# EAGLE board stm32f103_ethernet_shield_2 (EAGLE 9.6.2)
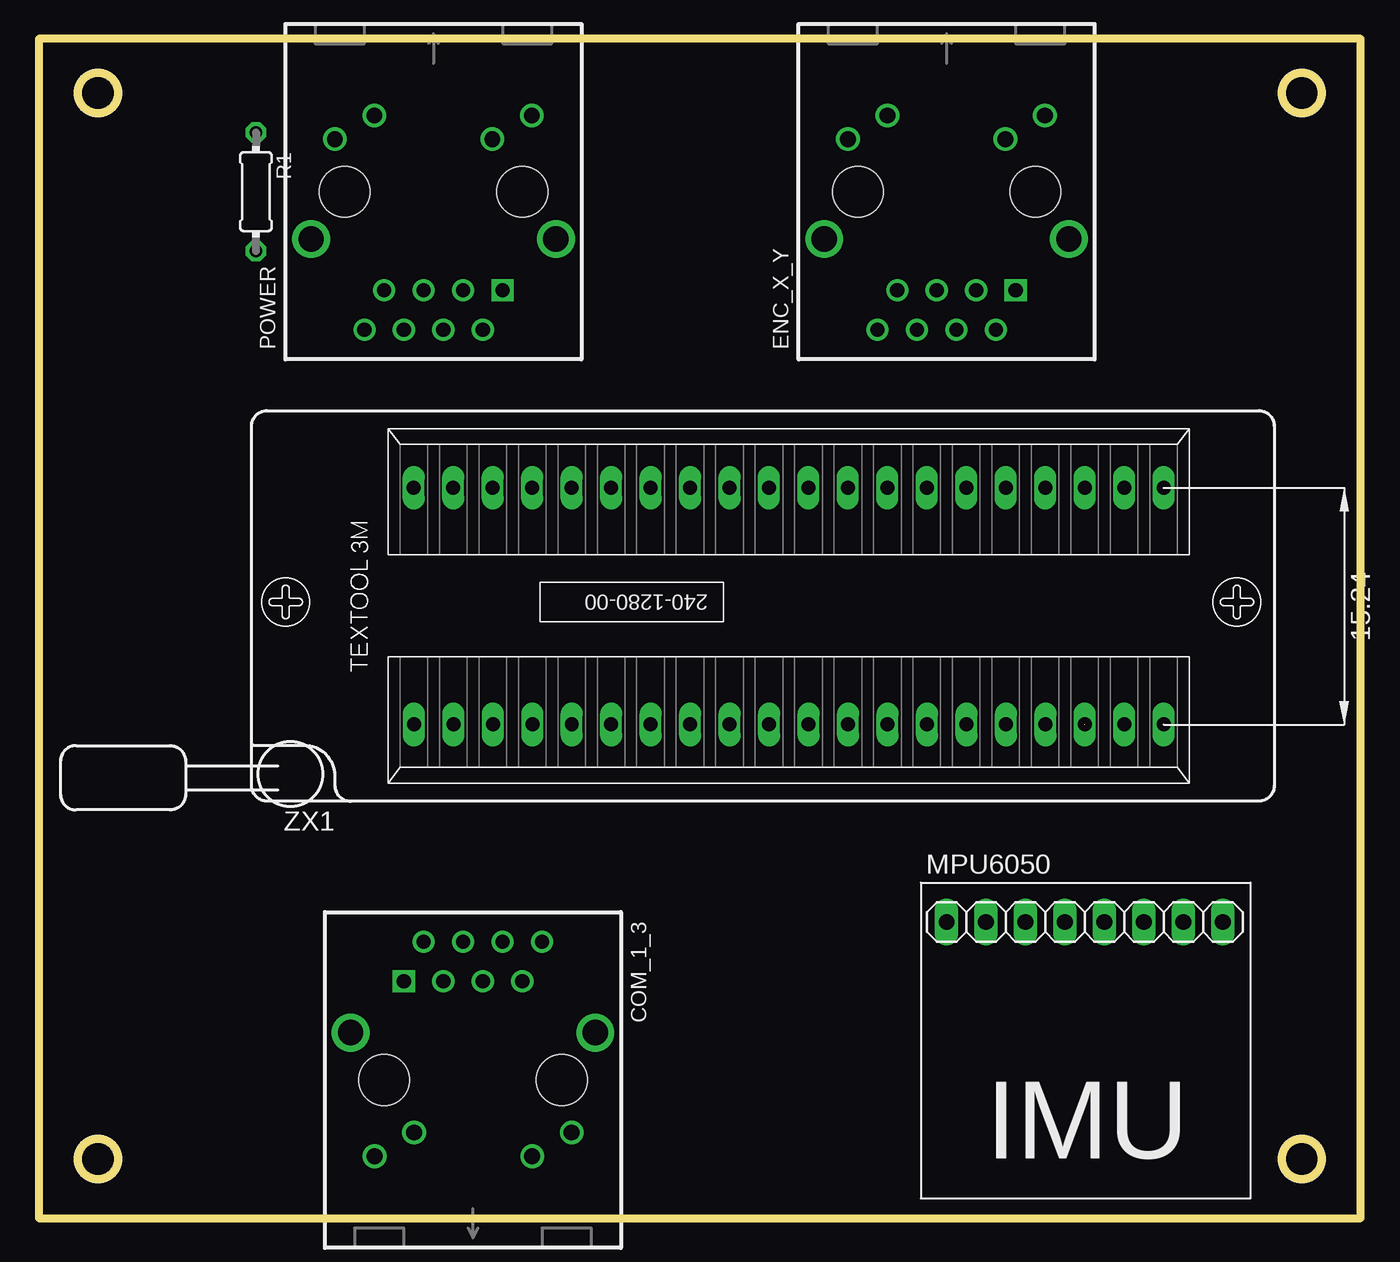
[diagram p0: board, top side]
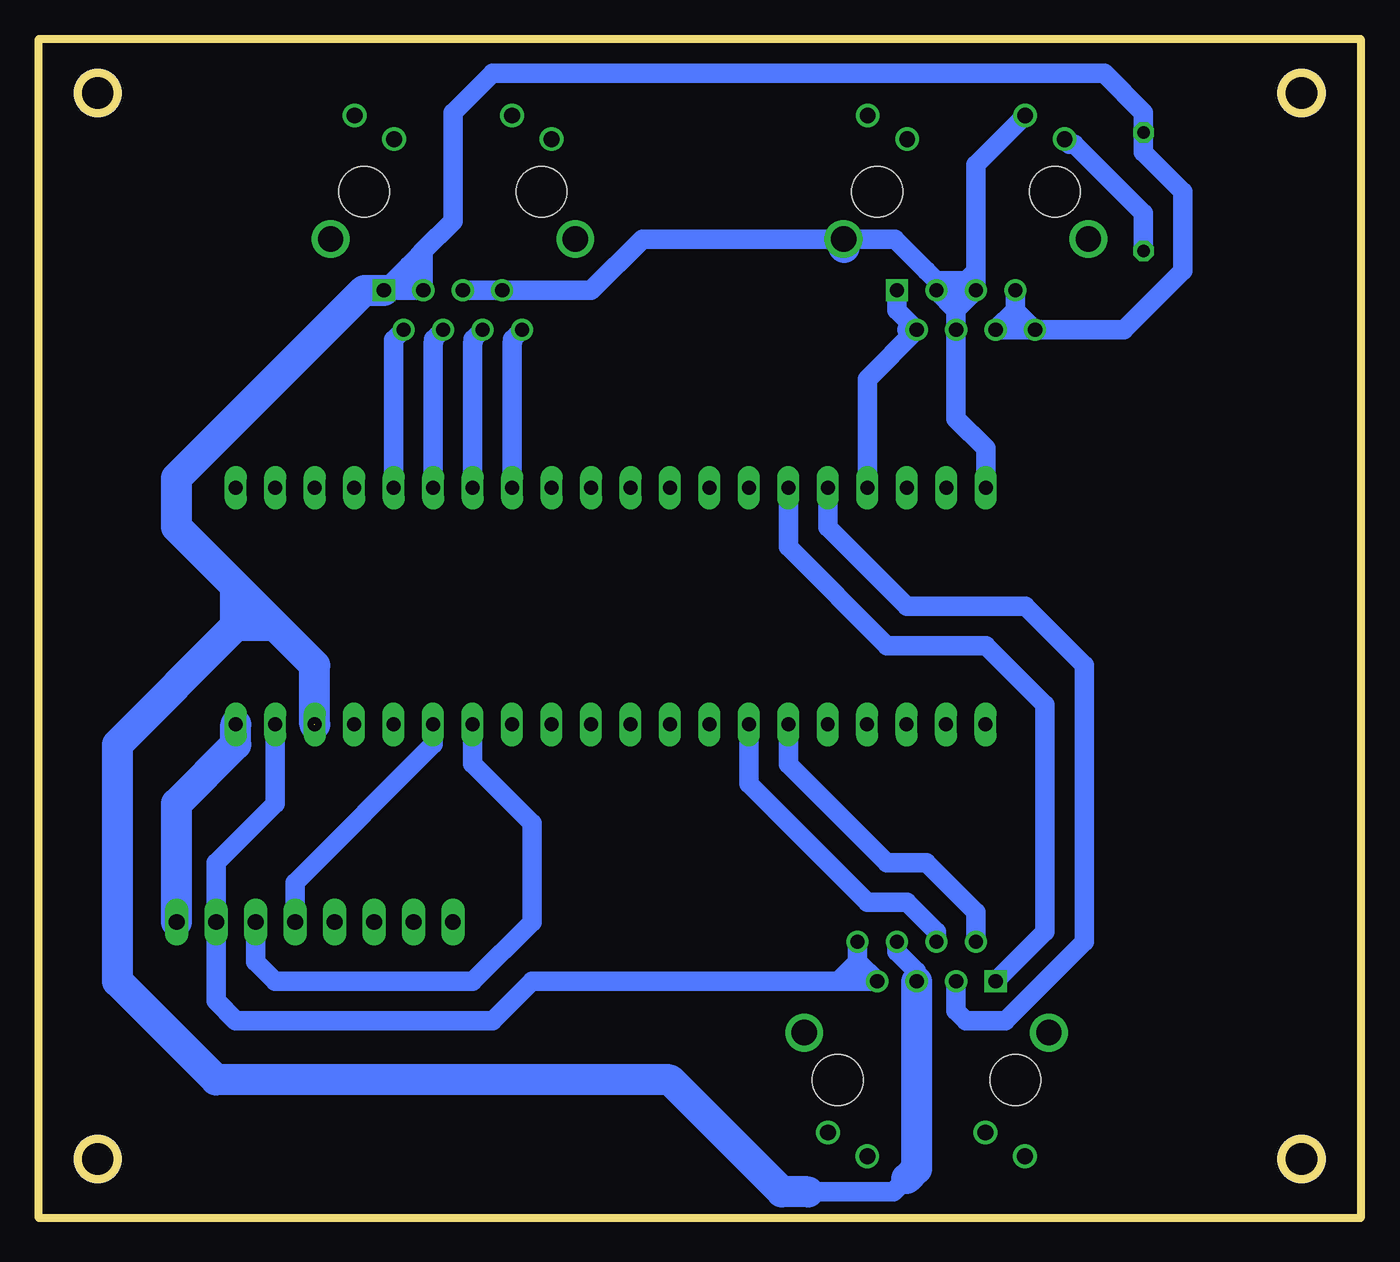
[diagram p1: board, bottom side, seen from below]

Size 85.07 x 75.87 mm. Coordinates in mm from the lower left corner, seen from the top.
Outline: 0,0 85.07,0 85.07,75.87 0,75.87 0,0
Outline: circle at 3.81,72.39 radius 1.27
Outline: circle at 81.28,72.39 radius 1.27
Outline: circle at 81.28,3.81 radius 1.27
Outline: circle at 3.81,3.81 radius 1.27
Copper layers (1*16): Top 0.035mm / dielectric 1.5mm / Bottom 0.035mm
Design rules "design_rules": minimum track width 0.8mm, minimum drill 1mm, track to track 0.6mm, track to pad 0.6mm, pad to pad 0.6mm, via to via 0.6mm, smd to smd 0.6mm, copper to edge 0.8mm, drill to drill 0.8mm, minimum pad ring 10mil, minimum via ring 8mil, stop-mask expansion 4mil, vias tented up to drill 0mil, thermal gap 10mil
Holes 3 mm at 3.81,72.39 3.81,3.81 81.28,3.81 81.28,72.39

## Footprints (pad centres in the part's own frame; a part is rotated, then mirrored left to right if it is on the bottom)
J0-A/B/F = drill 0.914 square: 1 4.445,-6.35 | drill 0.914: 2 3.175,-8.89; 3 1.905,-6.35; 4 0.635,-8.89; 5 -0.635,-6.35; 6 -1.905,-8.89; 7 -3.175,-6.35; 8 -4.445,-8.89 | drill 1.016: 9 6.325,4.902; 10 3.785,3.378; 11 -3.81,4.902; 12 -6.35,3.378 | drill 1.626: S1 -7.874,-3.048; S2 7.874,-3.048 | hole 3.251: -5.715,0; 5.715,0
IMU_GY521 = drill 1.016 long: ADO -6.35,0; GND 6.35,0; INT -8.89,0; SCL 3.81,0; SDA 1.27,0; VCC 8.89,0; XCL -3.81,0; XDA -1.27,0
0204/7 = drill 0.813 octagon: 1 -3.81,0; 2 3.81,0
240-1280-00-0602J = drill 0.9 long: 1 -24.12,-8.88; 2 -21.58,-8.88; 3 -19.04,-8.88; 4 -16.5,-8.88; 5 -13.96,-8.88; 6 -11.42,-8.88; 7 -8.88,-8.88; 8 -6.34,-8.88; 9 -3.8,-8.88; 10 -1.26,-8.88; 11 1.28,-8.88; 12 3.82,-8.88; 13 6.36,-8.88; 14 8.9,-8.88; 15 11.44,-8.88; 16 13.98,-8.88; 17 16.52,-8.88; 18 19.06,-8.88; 19 21.6,-8.88; 20 24.14,-8.88; 21 24.13,6.35; 22 21.59,6.35; 23 19.05,6.35; 24 16.51,6.35; 25 13.97,6.35; 26 11.43,6.35; 27 8.89,6.35; 28 6.35,6.35; 29 3.81,6.35; 30 1.27,6.35; 31 -1.27,6.35; 32 -3.81,6.35; 33 -6.35,6.35; 34 -8.89,6.35; 35 -11.43,6.35; 36 -13.97,6.35; 37 -16.51,6.35; 38 -19.05,6.35; 39 -21.59,6.35; 40 -24.13,6.35

## Placement (x,y rotation side)
COM_1_3  RJ45  [J0-A/B/F]  27.94,8.89 180 top
ENC_X_Y  RJ45  [J0-A/B/F]  58.42,66.04 0 top
MPU6050  IMU_ROBOCON_GY521  [IMU_GY521]  67.31,19.05 0 top
POWER  RJ45  [J0-A/B/F]  25.4,66.04 0 top
R1  150R  [0204/7]  13.97,66.04 270 top
ZX1  ZIF_401280  [240-1280-00-0602J]  48.26,40.64 0 top

## Library data of the parts
COM_1_3 MPU6050 POWER R1 ZX1 = MIA_LIBRARY-2-2-2
ENC_X_Y = MIA_LIBRARY-2-2-2; SPICEPREFIX: X

## Nets
3V3@1: MPU6050.VCC ZX1.20
3V3@2: ZX1.38
5V: COM_1_3.5 COM_1_3.6 ENC_X_Y.1 ENC_X_Y.3 POWER.6 POWER.7 POWER.8 R1.1 ZX1.18
GND@1: COM_1_3.7 COM_1_3.8 MPU6050.GND ZX1.19
GND@2: ZX1.39
GND@3: ENC_X_Y.5 ENC_X_Y.7 POWER.3 POWER.4 POWER.5 POWER.11 POWER.S2 ZX1.40
PA_0: ENC_X_Y.2 ZX1.25
PA_1: ENC_X_Y.4 ZX1.26
PA_2: ENC_X_Y.6 ZX1.27
PA_3: ENC_X_Y.8 ZX1.28
PA_4: ZX1.29
PA_5: ZX1.30
PA_6: ZX1.31
PA_7: ZX1.32
PA_8: ZX1.5
PA_9: COM_1_3.2 ZX1.6
PA_10: COM_1_3.4 ZX1.7
PA_11: ZX1.8
PA_12: ZX1.9
PA_15: ZX1.10
PB_0: ZX1.33
PB_1: ZX1.34
PB_3: ZX1.11
PB_4: ZX1.12
PB_5: ZX1.13
PB_6: MPU6050.SCL ZX1.14
PB_7: MPU6050.SDA ZX1.15
PB_8: ZX1.16
PB_9: ZX1.17
PB_10: COM_1_3.1 ZX1.35
PB_11: COM_1_3.3 ZX1.36
PB_12: ZX1.1
PB_13: ZX1.2
PB_14: ZX1.3
PB_15: ZX1.4
PC_13: ZX1.22
PC_14: ZX1.23
PC_15: ZX1.24
RA1: POWER.12 R1.2
RESET: POWER.1 POWER.2 ZX1.37
VB: ZX1.21

## Tracks (layer width: path | path; a pad name or v marks a point on that pad's centre or on a via)
3V3@1
  Bottom 2: ZX1.20 72.39,30.48 76.2,26.67 MPU6050.VCC
5V  (1 unrouted)
  Bottom 1.27: 60.96,59.69 ENC_X_Y.1 61.28,61.28 | 60.96,59.69 ENC_X_Y.3 60.33,61.59 | COM_1_3.6 29.84,17.14 28.57,15.88 COM_1_3.5 | 29.21,2.54 30.07,1.69 35.56,1.69 | POWER.8 15.24,57.15 11.43,60.96 11.43,66.04 13.97,68.58 R1.1 13.97,71.12 16.51,73.66 55.88,73.66 58.42,71.12 58.42,64.14 60.33,62.23 | 61.28,61.28 60.64,61.91 | 60.64,61.91 60.33,62.23 | 60.33,61.59 60.64,61.91 | 61.28,61.28 60.96,60.96 60.96,59.69 | 60.33,61.59 60.33,62.23 | POWER.8 POWER.6 22.23,58.42 | POWER.7 22.23,58.42 | POWER.8 22.23,58.42
  Bottom 2: 72.39,40.64 76.2,44.45 76.2,47.62 64.14,59.69 ENC_X_Y.1 | 72.39,40.64 71.12,39.37 | 71.12,39.37 69.85,38.1 | 69.85,38.1 67.31,35.56 ZX1.18 | COM_1_3.5 28.57,3.17 29.21,2.54 | 35.56,1.69 37.24,1.69 44.45,8.89 73.66,8.89 80.01,15.24 80.01,30.48 72.39,38.1 | 71.12,39.37 72.39,38.1 | 69.85,38.1 72.39,38.1 | 72.39,38.1 72.39,40.64
GND@1
  Bottom 1.27: ZX1.19 69.86,26.66 73.66,22.86 MPU6050.GND 73.66,13.97 72.39,12.7 55.88,12.7 53.34,15.24 34.29,15.24 33.66,15.24 | COM_1_3.8 32.38,16.51 | 32.38,16.51 COM_1_3.7 33.66,15.24 | 32.38,16.51 33.66,15.24
GND@3
  Bottom 1.27: ENC_X_Y.5 ENC_X_Y.7 49.53,59.69 46.23,62.99 POWER.S2 32.4,62.99 32.38,62.98 29.96,62.98 27.94,60.96 | POWER.3 POWER.5 | POWER.11 24.77,67.77 24.77,60.96 | 24.77,60.96 POWER.5 | 27.94,60.96 27.3,60.32 | POWER.3 27.3,60.32 | 27.94,60.96 | 24.77,60.96 25.41,60.32 27.3,60.32 | POWER.3 26.04,58.42 | 26.04,58.42 POWER.4 26.04,51.44 24.13,49.53 ZX1.40 | 26.04,58.42 POWER.5
  Bottom 2: POWER.S2 33.27,62.48 33.25,62.46
PA_0
  Bottom 1.27: ENC_X_Y.2 62.23,56.52 ZX1.25
PA_1
  Bottom 1.27: ENC_X_Y.4 59.65,56.56 59.65,56.34 59.69,56.3 ZX1.26
PA_2
  Bottom 1.27: ENC_X_Y.6 57.11,56.56 57.11,56.34 57.15,56.3 ZX1.27
PA_3
  Bottom 1.27: ENC_X_Y.8 54.57,56.56 54.57,56.34 54.61,56.3 ZX1.28
PA_9
  Bottom 1.27: COM_1_3.2 24.77,19.68 27.94,22.86 30.48,22.86 36.83,29.21 ZX1.6
PA_10
  Bottom 1.27: ZX1.7 39.38,27.95 31.75,20.32 29.21,20.32 27.3,18.41 COM_1_3.4
PB_6
  Bottom 1.27: MPU6050.SCL 71.12,16.51 69.85,15.24 57.15,15.24 53.34,19.05 53.34,25.4 57.16,29.22 ZX1.14
PB_7
  Bottom 1.27: ZX1.15 59.69,30.48 68.58,21.59 MPU6050.SDA
PB_10
  Bottom 1.27: ZX1.35 36.83,43.18 30.48,36.83 24.13,36.83 20.32,33.02 20.32,18.41 COM_1_3.1
PB_11
  Bottom 1.27: COM_1_3.3 26.04,13.34 25.4,12.7 22.86,12.7 17.78,17.78 17.78,35.56 21.59,39.37 29.21,39.37 34.29,44.45 ZX1.36
RA1
  Bottom 1.27: POWER.12 18.73,69.1 18.42,69.1 13.97,64.65 R1.2
RESET
  Bottom 1.27: POWER.1 29.84,58.42 POWER.2 | POWER.2 31.75,53.98 ZX1.37 | POWER.2 29.21,57.15 POWER.2